# EAGLE board all sensors (EAGLE 8.2.1)
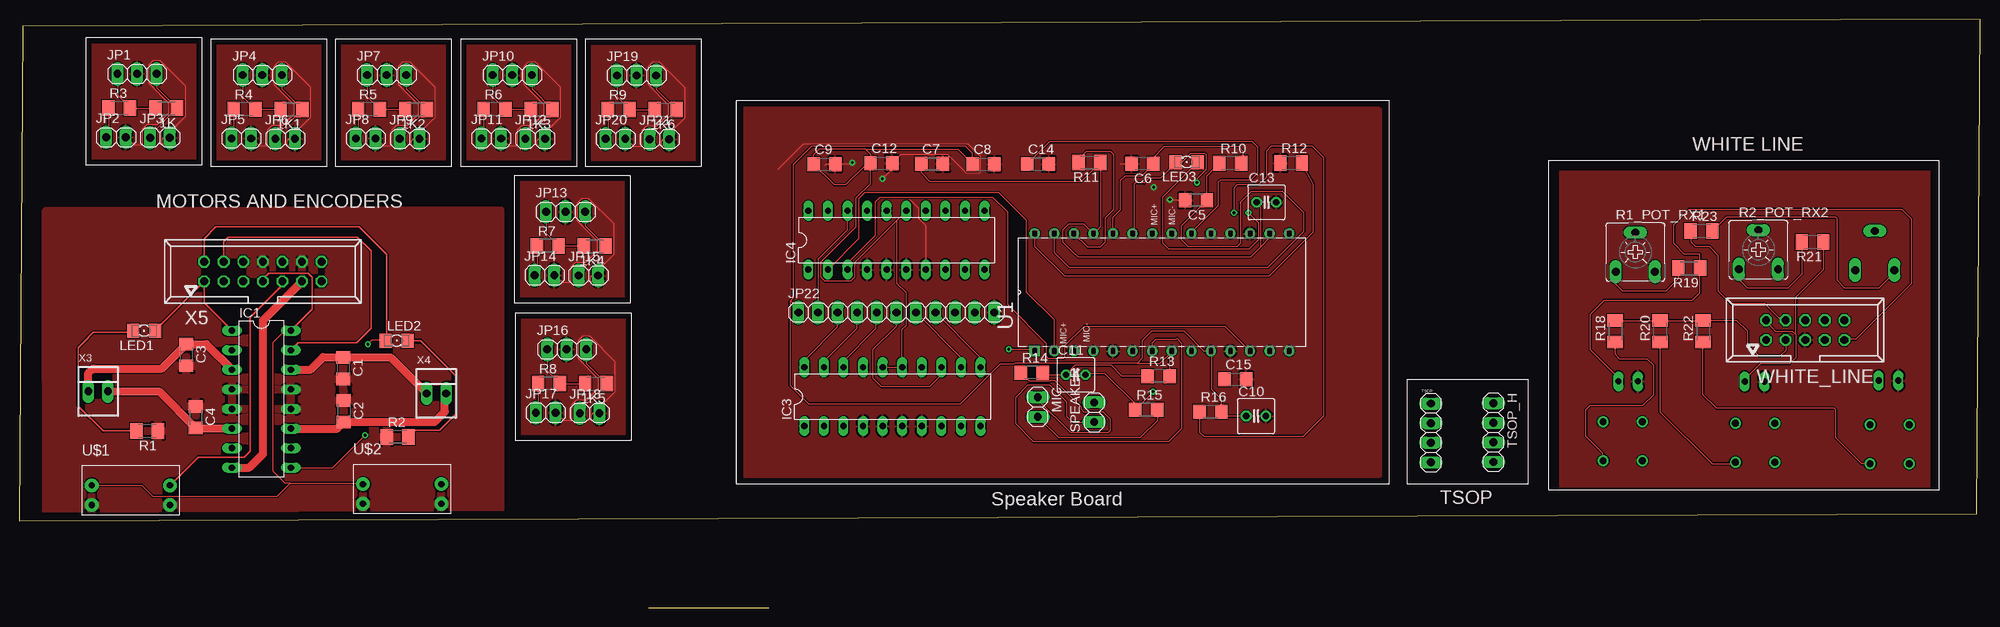
[diagram p0: board, top side]
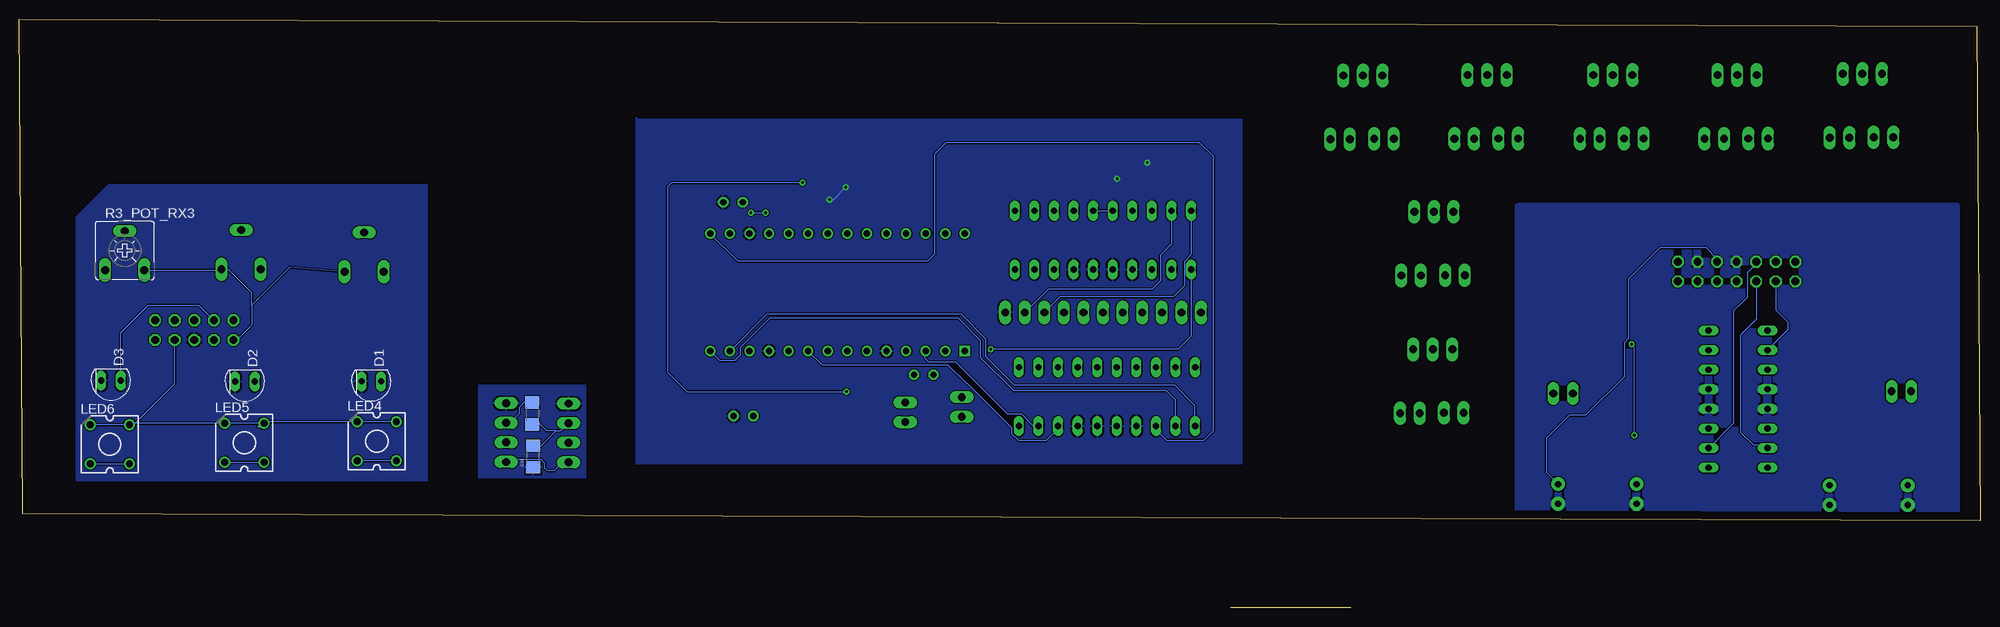
[diagram p1: board, bottom side, seen from below]

Size 254.38 x 76.29 mm. Coordinates in mm from the lower left corner, seen from the top.
Outline: 81.67,0 97.27,0
Outline: 0,11.24 253.96,12.17 254.38,76.29 0.42,75.36 0,11.24
Copper layers (1*16): Top 0.035mm / dielectric 1.5mm / Bottom 0.035mm
Design rules "default": minimum track width 6mil, minimum drill 0.35mm, track to track 6mil, track to pad 6mil, pad to pad 6mil, via to via 6mil, smd to smd 6mil, copper to edge 40mil, drill to drill 6mil, minimum pad ring 10mil, minimum via ring 8mil, stop-mask expansion 4mil, vias tented up to drill 0mil, thermal gap 10mil

## Footprints (pad centres in the part's own frame; a part is rotated, then mirrored left to right if it is on the bottom)
M1206 = smd 1.6 x 2: 1 -1.4,0; 2 1.4,0
C1206 = smd 1.6 x 1.8: 1 -1.4,0; 2 1.4,0
C025-050X050 = drill 0.813 octagon: 1 -1.27,0; 2 1.27,0
SFH206 = drill 0.813 long: A 0,-1.27; K 0,1.27
DIL16 = drill 0.813 long: 1 -8.89,-3.81; 2 -6.35,-3.81; 3 -3.81,-3.81; 4 -1.27,-3.81; 5 1.27,-3.81; 6 3.81,-3.81; 7 6.35,-3.81; 8 8.89,-3.81; 9 8.89,3.81; 10 6.35,3.81; 11 3.81,3.81; 12 1.27,3.81; 13 -1.27,3.81; 14 -3.81,3.81; 15 -6.35,3.81; 16 -8.89,3.81
DIL20 = drill 0.813 long: 1 -11.43,-3.81; 2 -8.89,-3.81; 3 -6.35,-3.81; 4 -3.81,-3.81; 5 -1.27,-3.81; 6 1.27,-3.81; 7 3.81,-3.81; 8 6.35,-3.81; 9 8.89,-3.81; 10 11.43,-3.81; 11 11.43,3.81; 12 8.89,3.81; 13 6.35,3.81; 14 3.81,3.81; 15 1.27,3.81; 16 -1.27,3.81; 17 -3.81,3.81; 18 -6.35,3.81; 19 -8.89,3.81; 20 -11.43,3.81
1X03 = drill 1.016 long: 1 -2.54,0; 2 0,0; 3 2.54,0
1X02 = drill 1.016 long: 1 -1.27,0; 2 1.27,0
1X11 = drill 1.016 long: 1 -12.7,0; 2 -10.16,0; 3 -7.62,0; 4 -5.08,0; 5 -2.54,0; 6 0,0; 7 2.54,0; 8 5.08,0; 9 7.62,0; 10 10.16,0; 11 12.7,0
1206 = smd 1.6 x 1.803: A -1.422,0; C 1.422,0
CP41B = drill 0.9 pad 1.27: 1 -2.54,2.54; 2 -2.54,-2.54; 3 2.54,-2.54; 4 2.54,2.54
CA6V = drill 1.016 long: A -2.54,-2.54; E 2.54,-2.54; S 0,2.54
R1206 = smd 1.6 x 1.803: 1 -1.422,0; 2 1.422,0
1X04 = drill 1.016 long: 1 -3.81,0; 2 -1.27,0; 3 1.27,0; 4 3.81,0
DIP254P1525X550-28P = drill 0.813 pad 1.3 square: 1 -7.62,16.51 | drill 0.813 pad 1.3: 2 -7.62,13.97; 3 -7.62,11.43; 4 -7.62,8.89; 5 -7.62,6.35; 6 -7.62,3.81; 7 -7.62,1.27; 8 -7.62,-1.27; 9 -7.62,-3.81; 10 -7.62,-6.35; 11 -7.62,-8.89; 12 -7.62,-11.43; 13 -7.62,-13.97; 14 -7.62,-16.51; 15 7.62,-16.51; 16 7.62,-13.97; 17 7.62,-11.43; 18 7.62,-8.89; 19 7.62,-6.35; 20 7.62,-3.81; 21 7.62,-1.27; 22 7.62,1.27; 23 7.62,3.81; 24 7.62,6.35; 25 7.62,8.89; 26 7.62,11.43; 27 7.62,13.97; 28 7.62,16.51
THROUGH_HOLE_NORMAL = drill 0.8 pad 1.778: 1 -5.08,1.27; 2 -5.08,-1.27; 3 5.08,-1.27; 4 5.08,1.27
057-010-1 = drill 1 octagon: 1 -5.08,-1.27; 2 -5.08,1.27; 3 -2.54,-1.27; 4 -2.54,1.27; 5 0,-1.27; 6 0,1.27; 7 2.54,-1.27; 8 2.54,1.27; 9 5.08,-1.27; 10 5.08,1.27
22-23-2021 = drill 1 long: 1 -1.27,0; 2 1.27,0
057-014-1 = drill 1 octagon: 1 -7.62,-1.27; 2 -7.62,1.27; 3 -5.08,-1.27; 4 -5.08,1.27; 5 -2.54,-1.27; 6 -2.54,1.27; 7 0,-1.27; 8 0,1.27; 9 2.54,-1.27; 10 2.54,1.27; 11 5.08,-1.27; 12 5.08,1.27; 13 7.62,-1.27; 14 7.62,1.27

## Placement (x,y rotation side)
1K  1k  [M1206]  19.07,64.76 180 top
1K1  1k  [M1206]  35.32,64.61 180 top
1K2  1k  [M1206]  51.46,64.61 180 top
1K3  1k  [M1206]  67.74,64.61 180 top
1K4  1k  [M1206]  74.65,46.87 180 top
1K5  1k  [M1206]  74.81,29.03 180 top
1K6  1k  [M1206]  83.86,64.56 180 top
C1  .1uf  [C1206]  42.03,31.04 270 top
C2  .1uf  [C1206]  42.1,25.46 270 top
C3  .1uf  [C1206]  21.67,32.76 270 top
C4  .1uf  [C1206]  22.89,24.67 270 top
C5  1n  [C1206]  152.67,52.81 180 top
C6  100n  [C1206]  145.71,57.55 180 top
C7  100n  [C1206]  118.41,57.54 0 top
C8  100n  [C1206]  125.08,57.51 0 top
C9  10u  [C1206]  104.45,57.49 0 top
C10  [C025-050X050]  160.44,24.83 0 top
C11  [C025-050X050]  137.04,30.2 0 top
C12  100n  [C1206]  111.83,57.64 0 top
C13  [C025-050X050]  161.79,52.55 0 top
C14  [C1206]  132.15,57.52 0 top
C15  [C1206]  157.75,29.6 0 top
C16  4.7uF  [C1206]  187.7,19.58 90 bottom
D1  SFH206  [SFH206]  208.71,29.33 90 bottom
D2  SFH206  [SFH206]  225.11,29.3 90 bottom
D3  SFH206  [SFH206]  242.49,29.43 90 bottom
IC1  L293D  [DIL16]  31.41,27.02 270 top
IC3  74AC11004  [DIL20]  113.27,27.34 0 top
IC4  74AC11004  [DIL20]  113.79,47.64 0 top
JP1  [1X03]  15.28,69.2 0 top
JP2  [1X02]  12.55,60.98 0 top
JP3  [1X02]  18.25,60.93 0 top
JP4  [1X03]  31.53,69.05 0 top
JP5  [1X02]  28.8,60.83 0 top
JP6  [1X02]  34.5,60.78 0 top
JP7  [1X03]  47.67,69.05 0 top
JP8  [1X02]  44.94,60.83 0 top
JP9  [1X02]  50.63,60.78 0 top
JP10  [1X03]  63.95,69.05 0 top
JP11  [1X02]  61.22,60.83 0 top
JP12  [1X02]  66.92,60.78 0 top
JP13  [1X03]  70.86,51.32 0 top
JP14  [1X02]  68.13,43.09 0 top
JP15  [1X02]  73.83,43.05 0 top
JP16  [1X03]  71.02,33.48 0 top
JP17  [1X02]  68.29,25.25 0 top
JP18  [1X02]  73.99,25.21 0 top
JP19  [1X03]  80.07,69.01 0 top
JP20  [1X02]  77.34,60.78 0 top
JP21  [1X02]  83.04,60.74 0 top
JP22  [1X11]  113.78,38.26 0 top
LED1  [1206]  16.2,35.89 180 top
LED2  [1206]  48.96,34.62 0 top
LED3  [1206]  151.46,57.76 180 top
LED4  [CP41B]  208,21.57 0 bottom
LED5  [CP41B]  225.18,21.37 0 bottom
LED6  [CP41B]  242.62,21.17 0 bottom
MIC  [1X02]  132.11,26 270 top
R1  1k  [M1206]  16.6,22.9 180 top
R1_POT_RX1  [CA6V]  209.65,46.1 0 top
R2  1k  [M1206]  49.09,22.11 0 top
R2_POT_RX2  [CA6V]  225.61,46.41 0 top
R3  1k  [M1206]  12.97,64.77 0 top
R3_POT_RX3  [CA6V]  240.7,46.3 0 bottom
R4  1k  [M1206]  29.22,64.62 0 top
R5  1k  [M1206]  45.36,64.62 0 top
R6  1k  [M1206]  61.65,64.62 0 top
R7  1k  [M1206]  68.56,46.89 0 top
R8  1k  [M1206]  68.71,29.05 0 top
R9  1k  [M1206]  77.77,64.58 0 top
R10  4.7K  [M1206]  157.1,57.61 0 top
R11  47K  [M1206]  138.83,57.71 180 top
R12  100k  [M1206]  164.99,57.64 0 top
R13  [R1206]  147.81,30.01 0 top
R14  [R1206]  131.35,30.47 0 top
R15  [R1206]  146.2,25.64 0 top
R16  [R1206]  154.54,25.38 0 top
R17  100E  [R1206]  187.83,25.17 90 bottom
R18  [M1206]  207.03,35.82 90 top
R19  [M1206]  216.62,44.02 180 top
R20  [M1206]  212.83,35.82 90 top
R21  [M1206]  232.62,47.42 180 top
R22  [M1206]  218.43,35.82 90 top
R23  [M1206]  218.23,48.82 0 top
SPEAKER  [1X02]  139.44,25.32 90 top
TSOP  [1X04]  183.12,22.64 270 top
TSOP_H  [1X04]  191.22,22.69 270 top
U1  APR9600_DIP-28  [DIP254P1525X550-28P]  148.23,40.88 90 top
U$1  MOC7811  [THROUGH_HOLE_NORMAL]  14.48,14.57 0 top
U$2  MOC7811  [THROUGH_HOLE_NORMAL]  49.67,14.74 0 top
WHITE_LINE  057-010-1  [057-010-1]  231.68,35.98 0 top
X3  LEFT_MOTOR  [22-23-2021]  10.23,28.03 0 top
X4  RIGHT_MOTOR  [22-23-2021]  54.11,27.77 0 top
X5  FRC_MOTOR  [057-014-1]  31.6,43.57 0 top

## Library data of the parts
1K 1K1-1K6 C1-C16 R1-R12 R17-R23 = rcl
D1-D3 = opto-trans-siemens; MPN: SFH206K; OC_FARNELL: 1212741; OC_NEWARK: 01M8807
IC1 = st-microelectronics; MPN: L293D; OC_FARNELL: 9589619; OC_NEWARK: 56P8249
IC3 IC4 = 74ac-logic
JP1-JP22 MIC SPEAKER TSOP TSOP_H = pinhead
LED1 LED2 LED4-LED6 = led
LED3 = adafruit
R1_POT_RX1 R2_POT_RX2 R3_POT_RX3 = pot
R13-R16 = resistor
U1 = aplus; MPN: APR9600_DIP-28; OC_FARNELL: unknown; OC_NEWARK: unknown; PACKAGE: DIP-28; SUPPLIER: APLUS INTEGRATED CIRCUITS INC
U$1 U$2 = Motor encoder MOC7811
WHITE_LINE X5 = con-panduit; OC_FARNELL: unknown; OC_NEWARK: unknown
X3 X4 = con-molex; MF: MOLEX; MPN: 22-23-2021; OC_FARNELL: 1462926; OC_NEWARK: 25C3832

## Nets
3.3V: R18.2 R20.2 R22.2 WHITE_LINE.3
5V: R1_POT_RX1.E R2_POT_RX2.E R3_POT_RX3.E WHITE_LINE.1
APR_1_M6: IC4.1 U1.1
APR_2_M7: IC4.2 U1.2
APR_3_M4: IC3.9 U1.3
APR_4_M5: IC3.10
APR_9_M3: IC3.8 U1.9
APR_12_REC: IC4.3 U1.12
APR_13_M0: IC3.1 U1.13
APR_14_M1: IC3.2 U1.14
APR_15_M2: IC3.3 U1.15
BATTERY_12V: IC1.8 X5.11
ENCODER_DATA_DL: U$1.4 X5.9
ENCODER_DATA_DR: U$2.4 X5.10
GND: C1.2 C2.1 C3.2 C4.1 IC1.4 IC1.5 IC1.12 IC1.13 R1.1 R2.1 U$1.2 U$1.3 U$2.2 U$2.3 X5.8 X5.12
GND1: JP1.2 JP2.2 JP3.2
GND2: JP4.2 JP5.2 JP6.2
GND3: JP7.2 JP8.2 JP9.2
GND4: JP10.2 JP11.2 JP12.2
GND5: JP13.2 JP14.2 JP15.2
GND6: JP16.2 JP17.2 JP18.2
GND7: JP19.2 JP20.2 JP21.2
GND8: C5.2 C6.2 C7.2 C8.2 C9.2 C10.2 C12.2 C13.2 C14.2 C15.2 IC3.4 IC3.5 IC3.6 IC3.7 IC4.4 IC4.5 IC4.6 IC4.7 JP22.11 R12.1 U1.5 U1.11 U1.17
GND9: C16.1 TSOP.1 TSOP_H.1
GND10: D1.K D2.K D3.K WHITE_LINE.5
INVERT_A2_M7_SPEAKER: IC4.19 JP22.10
INVERT_A3_M6_SPEAKER: IC4.20 JP22.9
INVERT_A4_M5_SPEAKER: IC3.11 JP22.8
INVERT_A5_M4_SPEAKER: IC3.12 JP22.7
INVERT_A6_M3_SPEAKER: IC3.13 JP22.6
INVERT_A7_M2_SPEAKER: IC3.18 JP22.5
INVERT_H3_M1_SPEAKER: IC3.19 JP22.4
INVERT_H4_M0_SPEAKER: IC3.20 JP22.3
INVERT_H4_REC: IC4.18 JP22.2
L293D_A0_IP1L: IC1.2 X5.3
L293D_A2_IP2L: IC1.7 X5.5
L293D_A3_IP1R: IC1.15 X5.4
L293D_A4_IP2R: IC1.10 X5.6
L293D_E3_PWM_L: IC1.1 LED1.A X5.1
L293D_E4_PWM_R: IC1.9 LED2.A X5.2
L293D_L1_OUT: C3.1 IC1.3 X3.1
L293D_L2_OUT: C4.2 IC1.6 X3.2
L293D_R1_OUT: C1.1 IC1.14 X4.1
L293D_R2_OUT: C2.2 IC1.11 X4.2
MIC+: U1.22
MIC-: U1.21
MICG: C11.2 LED3.C R15.1 U1.23
N$1: JP5.1 R4.1
N$2: LED1.C R1.2
N$3: JP8.1 R5.1
N$4: LED2.C R2.2
N$5: JP11.1 R6.1
N$6: JP14.1 R7.1
N$7: JP17.1 R8.1
N$8: JP20.1 R9.1
N$9: JP2.1 R3.1
N$10: C11.1 R13.1 R14.2
N$11: MIC.1 R14.1
N$12: MIC.2 R15.2
N$13: LED3.A R16.1
N$14: R1_POT_RX1.A R19.2
N$15: R2_POT_RX2.A R21.2
N$16: R3_POT_RX3.A R23.2
N$17: LED6.2 LED6.3 R22.1
N$18: LED4.2 LED4.3 R18.1
N$19: WHITE_LINE.6
N$20: WHITE_LINE.8
N$21: WHITE_LINE.10
N$22: LED5.2 LED5.3 R20.1
PIN_DATA: 1K.1 JP1.3 JP3.1
PIN_DATA1: 1K1.1 JP4.3 JP6.1
PIN_DATA2: 1K2.1 JP7.3 JP9.1
PIN_DATA3: 1K3.1 JP10.3 JP12.1
PIN_DATA4: 1K4.1 JP13.3 JP15.1
PIN_DATA5: 1K5.1 JP16.3 JP18.1
PIN_DATA6: 1K6.1 JP19.3 JP21.1
PIN_DATA_A1: LED4.1 LED4.4 LED5.1 LED5.4 LED6.1 LED6.4 WHITE_LINE.7
PIN_DATA_K0: D1.A R19.1 WHITE_LINE.9
PIN_DATA_K1: D2.A R21.1 WHITE_LINE.2
PIN_DATA_K2: D3.A R23.1 WHITE_LINE.4
ROSC: R11.2 U1.26
RSTB: C5.1 R10.1 U1.27
SENSOR_5V: IC1.16 U$1.1 U$2.1 X5.7
SENSOR_5V1: 1K.2 JP1.1 R3.2
SENSOR_5V2: 1K1.2 JP4.1 R4.2
SENSOR_5V3: 1K2.2 JP7.1 R5.2
SENSOR_5V4: 1K3.2 JP10.1 R6.2
SENSOR_5V5: 1K4.2 JP13.1 R7.2
SENSOR_5V6: 1K5.2 JP16.1 R8.2
SENSOR_5V7: 1K6.2 JP19.1 R9.2
SENSOR_5V8: R17.2 TSOP_H.2
SRSTB: R12.2 U1.28
TSOP_2_5V: C16.2 R17.1 TSOP.2
TSOP_DATA_F1: TSOP.4 TSOP_H.4
VCC: C8.1 C9.1 C10.1 C12.1 IC3.15 IC3.16 IC4.15 IC4.16 JP22.1 R13.2 R16.2 U1.8 U1.10
VCM: C14.1 U1.20
VDDL: C6.1 R10.2 U1.24
VLDO: C7.1 C13.1 R11.1 U1.16 U1.25
VOUT1: SPEAKER.1 U1.7
VOUT2: SPEAKER.2
VREF: C15.1

## Tracks (layer width: path | path; a pad name or v marks a point on that pad's centre or on a via)
3.3V
  Top 0.152: R18.2 R20.2 R22.2 222.83,37.22 224.23,35.82 224.23,34.02 225.62,32.62 228.43,32.62 229.14,33.33 WHITE_LINE.3
5V
  Bottom 0.152: WHITE_LINE.1 226.14,34.71 224.23,36.62 224.23,39.22 | 224.23,39.22 224.23,40.82 227.28,43.87 R2_POT_RX2.E 228.26,43.76 R3_POT_RX3.E | R1_POT_RX1.E 219.29,44.16 224.23,39.22
APR_1_M6  (via drill 0.35)
  Top 0.152: v128.36,33.5 131.49,33.5 U1.1
  Bottom 0.152: IC4.1 102.36,35.2 104.07,33.5 v128.36,33.5
APR_2_M7
  Top 0.152: U1.2 134.26,37.3 130.67,40.9 130.67,50.2 127.07,53.8 109.67,53.8 108.87,53 108.87,47.8 IC4.2
APR_3_M4
  Bottom 0.152: IC3.9 122.79,23.53 124.34,25.08 126.14,25.08 132.87,31.8 136.37,31.8 136.87,32.3 136.87,33.2 U1.3
APR_9_M3
  Bottom 0.152: IC3.8 119.62,23.14 121.17,21.6 124.69,21.6 125.59,22.5 125.59,23.23 131.37,29 131.47,29 133.87,31.4 150.18,31.4 U1.9
APR_12_REC
  Top 0.152: IC4.3 107.44,44.68 111.07,48.3 111.07,52.6 111.67,53.2 126.27,53.2 128.17,51.3 128.17,39.3 133.17,34.3 133.17,32.6 133.47,32.3 135.47,32.3 135.67,32.5 135.67,34 138.17,36.5 156.43,36.5 U1.12
APR_13_M0
  Bottom 0.152: IC3.1 101.84,26.18 104.47,28.8 125.27,28.8 128.97,32.5 128.97,34.8 132.17,38 157.47,38 U1.13
APR_14_M1
  Bottom 0.152: IC3.2 104.38,26.92 105.57,28.1 125.37,28.1 129.67,32.4 129.67,34.6 132.57,37.5 157.07,37.5 160.87,33.7 160.87,32.7 161.57,32 163.48,32 U1.14
APR_15_M2
  Bottom 0.152: IC3.3 106.92,23.06 105.57,21.7 100.67,21.7 99.47,22.9 99.47,58.5 101.27,60.3 134.17,60.3 135.67,58.8 135.67,45.8 136.57,44.9 161.14,44.9 U1.15
BATTERY_12V
  Top 1.016: IC1.8 29.82,18.13 31.62,19.93 31.62,37.25 X5.11
ENCODER_DATA_DL
  Top 0.2: X5.9 34.14,41.84 29.97,37.67 29.97,20.3 29.18,19.5 23.22,19.5 U$1.4
ENCODER_DATA_DR
  Bottom 0.152: X5.10 34.14,45.23 35.56,46.65 | 35.56,46.65 35.65,46.74 | 35.56,46.65 41.56,46.65 45.63,42.58 45.63,34.91 46.19,34.35 46.19,29.95 51.2,24.93 53.31,24.93 56.3,21.94 56.3,17.56 U$2.4
GND
  pour Top: 62.38,51.56 62.38,6.94 3.5,6.94 3.44,51.43
  pour Bottom: 59.93,51.96 59.93,9.84 3.11,9.84 3.11,51.8 3.11,51.8 3.11,52
GND1
  Top 0.152: JP2.2 13.94,60.98 14.88,60.04 15.99,60.04 15.99,62.11 16.57,62.69 17.97,62.69 19.44,64.16 19.44,65.36 16.83,67.97 16.83,70.38 17.41,70.96 18.23,70.96 21.5,67.69 21.5,63.66 18.47,60.63 18.47,60.04 18.62,60.04 JP3.2
  pour Top: 10.05,73.14 22.86,73.14 22.86,58.14 17.05,58.14 9.46,58.14 9.46,73.14
GND2
  Top 0.152: JP5.2 30.19,60.83 31.13,59.89 32.23,59.89 32.23,61.95 32.81,62.54 34.22,62.54 35.69,64.01 35.69,65.2 33.08,67.81 33.08,70.22 33.66,70.8 34.48,70.8 37.75,67.54 37.75,63.51 34.72,60.48 34.72,59.89 34.87,59.89 JP6.2
  pour Top: 26.3,72.99 39.1,72.99 39.1,57.99 33.3,57.99 25.7,57.99 25.7,72.99
GND3
  Top 0.152: JP8.2 46.33,60.83 47.27,59.89 48.37,59.89 48.37,61.95 48.95,62.54 50.35,62.54 51.83,64.01 51.83,65.2 49.22,67.81 49.22,70.22 49.8,70.8 50.62,70.8 53.88,67.54 53.88,63.51 50.85,60.48 50.85,59.89 51.01,59.89 JP9.2
  pour Top: 42.44,72.99 55.24,72.99 55.24,57.99 49.44,57.99 41.84,57.99 41.84,72.99
GND4
  Top 0.152: JP11.2 62.61,60.83 63.55,59.89 64.66,59.89 64.66,61.95 65.24,62.54 66.64,62.54 68.12,64.01 68.12,65.2 65.5,67.81 65.5,70.22 66.08,70.8 66.91,70.8 70.17,67.54 70.17,63.51 67.14,60.48 67.14,59.89 67.3,59.89 JP12.2
  pour Top: 58.73,72.99 71.53,72.99 71.53,57.99 65.73,57.99 58.13,57.99 58.13,72.99
GND5
  Top 0.152: JP14.2 69.52,43.09 70.47,42.15 71.57,42.15 71.57,44.22 72.15,44.8 73.55,44.8 75.03,46.28 75.03,47.47 72.41,50.08 72.41,52.49 72.99,53.07 73.81,53.07 77.08,49.8 77.08,45.78 74.05,42.75 74.05,42.15 74.21,42.15 JP15.2
  pour Top: 65.64,55.26 78.44,55.26 78.44,40.26 72.64,40.26 65.04,40.26 65.04,55.26
GND6
  Top 0.152: JP17.2 69.68,25.25 70.62,24.31 71.72,24.31 71.72,26.38 72.3,26.96 73.71,26.96 75.18,28.43 75.18,29.63 72.57,32.24 72.57,34.65 73.15,35.23 73.97,35.23 77.24,31.96 77.24,27.94 74.2,24.91 74.2,24.31 74.36,24.31 JP18.2
  pour Top: 65.79,37.42 78.59,37.42 78.59,22.42 72.79,22.42 65.19,22.42 65.19,37.42
GND7
  Top 0.152: JP20.2 78.73,60.78 79.67,59.84 80.78,59.84 80.78,61.91 81.36,62.49 82.76,62.49 84.23,63.96 84.23,65.16 81.62,67.77 81.62,70.18 82.2,70.76 83.03,70.76 86.29,67.49 86.29,63.47 83.26,60.43 83.26,59.84 83.42,59.84 JP21.2
  pour Top: 74.85,72.95 87.65,72.95 87.65,57.95 81.85,57.95 74.25,57.95 74.25,72.95
GND8  (via drill 0.35)
  Top 0.152: 142.87,57.55 C6.2 | C5.2 149.36,52.81 v149.27,52.9 | v111.97,55.6 113.23,56.86 C12.2 114.36,58.77 120.4,58.77 122.79,56.38 124.58,56.38 124.71,56.51 124.71,58.5 123.11,60.11 101.67,60.11 98.35,56.78 | 104.47,57.3 104.66,57.49 C9.2 107.86,57.49 v108.07,57.7 | IC4.7 117.6,49.53 116.72,50.42 116.72,51.72 115.54,52.9
  Bottom 0.152: v149.27,52.9 148.77,52.9 v147.17,54.5
  pour Top: 93.97,16.9 176.57,16.9 176.77,17.1 176.77,64.6 176.47,64.9 93.97,64.9
  pour Bottom: 95.77,18.6 174.37,18.6 174.37,63.6 174.17,63.4 95.77,63.4
GND9
  pour Bottom: 180.87,28.8 194.87,28.8 194.87,16.8 180.87,16.8
GND10
  Bottom 0.152: D2.K 226.38,29.41
  pour Bottom: 201.43,54.82 242.83,54.82 247.03,50.62 247.03,16.42 201.43,16.42
  pour Top: 199.83,56.62 247.83,56.62 247.83,15.62 199.83,15.62
INVERT_A2_M7_SPEAKER
  Bottom 0.152: IC4.19 104.9,47.16 106.37,45.7 106.37,42.4 107.47,41.3 120.9,41.3 JP22.10
INVERT_A3_M6_SPEAKER
  Bottom 0.152: IC4.20 102.36,45.75 103.25,44.86 103.25,41.72 104.67,40.3 119.36,40.3 JP22.9
INVERT_A4_M5_SPEAKER
  Top 0.152: IC3.11 124.7,32.41 JP22.8
INVERT_A5_M4_SPEAKER
  Top 0.152: IC3.12 122.16,32.41 JP22.7
INVERT_A6_M3_SPEAKER
  Top 0.152: IC3.13 119.62,30.16 118.07,28.6 111.87,28.6 110.77,29.7 110.77,33.5 113.77,36.5 113.77,38.25 JP22.6
INVERT_A7_M2_SPEAKER
  Top 0.152: IC3.18 106.92,31.96 111.17,36.2 111.17,38.19 JP22.5
INVERT_H3_M1_SPEAKER
  Top 0.152: IC3.19 104.38,31.92 108.67,36.2 108.67,38.23 JP22.4
INVERT_H4_M0_SPEAKER
  Top 0.152: IC3.20 101.84,32.08 106.17,36.4 JP22.3
INVERT_H4_REC
  Top 0.152: JP22.2 103.62,45.15 107.47,49 107.47,51.43 IC4.18
L293D_A0_IP1L
  Bottom 0.152: X5.3 26.52,38.61 24.99,37.08 24.99,35.99 IC1.2
L293D_A2_IP2L
  Bottom 0.152: X5.5 29.06,37.4 31.12,35.34 31.12,22.76 29.45,21.09 28.02,21.09 IC1.7
L293D_A3_IP1R
  Top 0.2: X5.4 26.52,47.47 27.08,48.03 43.86,48.03 45.65,46.24 45.65,36.24 43.74,34.33 36.17,34.33 IC1.15
L293D_A4_IP2R
  Bottom 0.152: X5.6 29.06,44.56 30.22,43.4 30.22,40.24 31.09,39.38 32.01,38.46 32.01,23.89 IC1.10
L293D_E3_PWM_L
  Top 0.2: LED1.A 17.62,35.95 X5.1 23.98,39.54 IC1.1
L293D_E4_PWM_R  (via drill 0.35)
  Top 0.152: IC1.9 40.65,18.13 v44.86,22.35 | v45.23,34.15 45.23,34.19 45.76,34.72 47.44,34.72 LED2.A
  Top 0.2: X5.2 23.98,47.85 25.48,49.35 44.1,49.35 47.65,45.8 47.65,34.73 LED2.A
  Bottom 0.152: v44.86,22.35 44.86,33.78 v45.23,34.15
L293D_L1_OUT
  Top 1.016: X3.1 8.96,30.42 9.53,30.99 18.51,30.99 C3.1 24.28,34.16 IC1.3
L293D_L2_OUT
  Top 1.016: X3.2 18.13,28.03 C4.2 27.55,23.27 IC1.6
L293D_R1_OUT
  Top 1.016: IC1.14 37.78,30.84 39.4,32.46 42.02,32.46 C1.1 48.16,32.44 X4.1
L293D_R2_OUT
  Top 1.016: IC1.11 41.26,23.21 C2.2 53.87,24.06 55.19,25.39 55.19,27.58 X4.2
MICG  (via drill 0.35)
  Top 0.152: 144.42,48.66 U1.23 144.57,48.65 144.57,54.9 144.77,55.1 145.97,55.1 | C11.2 138.42,30.3 140.87,30.3 144.77,26.39 R15.1 147.07,27.94 v147.07,28 | 145.97,55.1 146.57,55.7 148.07,55.7 150.03,57.67 LED3.C 150.85,57.76 151.98,58.89 153.77,58.89 153.91,58.76 153.91,56.77 152.77,55.63 v152.77,55.1 | 145.97,55.1 145.87,55
  Bottom 0.152: v152.77,55.1 169.77,55.1 170.27,54.6 170.27,30.5 167.77,28 v147.07,28
N$1
  Top 0.152: R4.1 27.82,61.12 JP5.1
N$2
  Top 0.2: R1.2 10.87,22.9 7.65,26.12 7.65,33.71 8.29,34.35 9.62,35.68 14.57,35.68 LED1.C
N$3
  Top 0.152: R5.1 43.96,61.12 JP8.1
N$4
  Top 0.2: LED2.C 52.04,34.62 56.61,30.04 56.61,25.07 54.5,22.96 51.34,22.96 R2.2
N$5
  Top 0.152: R6.1 60.25,61.12 JP11.1
N$6
  Top 0.152: R7.1 67.16,43.39 JP14.1
N$7
  Top 0.152: R8.1 67.31,25.55 JP17.1
N$8
  Top 0.152: R9.1 76.37,61.08 JP20.1
N$9
  Top 0.152: R3.1 11.57,61.27 JP2.1
N$10
  Top 0.152: R14.2 133.04,30.2 C11.1 136.98,31.4 141.67,31.4 143.06,30.01 R13.1
N$11
  Top 0.152: MIC.1 132.11,26.95 136.37,22.7 141.27,22.7 141.57,23 141.57,24.4 140.62,25.35 | 140.62,25.35 140.57,25.4 | 140.62,25.35 138.12,25.35 137.77,25.7 137.77,26 134.37,29.4 133.73,29.4 133.67,29.34 131.06,29.34 R14.1
N$12
  Top 0.152: R15.2 147.62,24.25 145.37,22 134.84,22 MIC.2
N$13  (via drill 0.35)
  Top 0.152: R16.1 153.11,22.75 153.67,22.2 166.57,22.2 169.27,24.9 169.27,58.3 167.77,59.8 162.37,59.8 161.77,59.2 161.77,55.8 160.77,54.8 157.97,54.8 157.57,54.4 v157.57,51.2 158.11,51.2 | LED3.A 152.83,57.76 148.27,53.2 148.27,47.3 149.07,46.5 151.54,46.5 159.56,46.5 160.76,47.7 160.76,49.91 v159.47,51.2
  Bottom 0.152: v159.47,51.2 158.27,51.2 | 158.27,51.2 157.67,51.2 | 158.27,51.2 v157.57,51.2
N$14
  Top 0.152: R19.2 215.23,42.62 213.62,41.02 208.03,41.02 207.03,42.02 207.03,43.48 R1_POT_RX1.A
N$15
  Top 0.152: R21.2 231.23,43.22 229.43,41.42 224.23,41.42 223.03,42.62 223.03,43.83 R2_POT_RX2.A
N$16
  Top 0.152: R3_POT_RX3.A 243.24,43.43 241.23,41.42 236.83,41.42 235.83,42.42 235.83,50.42 235.62,50.62 221.43,50.62 R23.2
N$17
  Top 0.152: LED6.3 239.02,18.63 235.62,22.02 235.62,25.62 235.43,25.82 220.23,25.82 218.43,27.62 R22.1
  Bottom 0.152: LED6.2 LED6.3
N$18
  Top 0.152: 206.03,34.42 R18.1 207.03,32.82 207.62,32.22 211.23,32.22 212.03,31.42 212.03,27.62 210.62,26.22 203.83,26.22 203.23,25.62 203.23,22.22 205.46,19.99 LED4.3
  Bottom 0.152: LED4.3 LED4.2
N$22
  Top 0.152: R20.1 212.83,25.42 219.62,18.62 222.43,18.62 LED5.3
  Bottom 0.152: LED5.2 LED5.3
PIN_DATA
  Top 0.152: JP3.1 16.98,61.24 18.94,63.2 18.94,63.23 1K.1 17.82,67.41 JP1.3
PIN_DATA1
  Top 0.152: JP6.1 33.23,61.09 35.19,63.05 35.19,63.07 1K1.1 34.07,67.26 JP4.3
PIN_DATA2
  Top 0.152: JP9.1 49.37,61.09 51.32,63.05 51.32,63.07 1K2.1 50.21,67.26 JP7.3
PIN_DATA3
  Top 0.152: JP12.1 65.65,61.09 67.61,63.05 67.61,63.07 1K3.1 66.5,67.26 JP10.3
PIN_DATA4
  Top 0.152: JP15.1 72.56,43.36 74.52,45.32 74.52,45.34 1K4.1 73.41,49.52 JP13.3
PIN_DATA5
  Top 0.152: JP18.1 72.72,25.51 74.67,27.47 74.67,27.5 1K5.1 73.56,31.68 JP16.3
PIN_DATA6
  Top 0.152: JP21.1 81.77,61.04 83.73,63 83.73,63.03 1K6.1 82.61,67.21 JP19.3
PIN_DATA_A1
  Bottom 0.152: LED4.4 LED4.1 222.74,24.11 223.43,23.42 223.12,23.42 LED5.4 LED5.1 239.89,23.91 LED6.4 | LED6.4 LED6.1 | LED6.4 239.54,23.71 234.23,29.02 234.23,34.7 WHITE_LINE.7
PIN_DATA_K0
  Top 0.152: WHITE_LINE.9 236.87,34.82 238.23,34.82 245.43,42.02 245.43,50.42 244.23,51.62 216.62,51.62 214.62,49.62 214.62,47.22 216.03,45.82 218.03,45.82 R19.1 218.03,40.82 217.03,39.82 205.62,39.82 203.83,38.02 203.83,33.42 207.44,29.81 D1.A
PIN_DATA_K1
  Top 0.152: 230.43,35.42 230.43,40.22 234.03,43.82 R21.1 | 230.43,35.42 230.43,32.42 229.62,31.62 225.83,31.62 223.84,29.63 D2.A | WHITE_LINE.2 226.6,37.05 227.33,36.32 | 227.43,36.22 227.33,36.32 | 227.33,36.32 227.83,35.82 230.03,35.82 230.43,35.42
PIN_DATA_K2
  Top 0.152: R23.1 216.83,47.42 217.43,46.82 219.23,46.82 220.43,45.62 220.43,41.02 222.03,39.42 226.43,39.42 228.6,37.25 WHITE_LINE.4
  Bottom 0.152: D3.A 241.22,35.63 237.62,39.22 231.11,39.22 WHITE_LINE.4
ROSC
  Top 0.152: R11.2 137.43,58.16 138.47,59.2 141.57,59.2 141.97,58.8 141.97,51.6 140.87,50.5 140.87,47.4 140.17,46.7 138.61,46.7 U1.26
RSTB
  Top 0.152: 134.26,46.01 134.27,46 | 134.27,46 136.17,44.1 161.97,44.1 166.67,48.8 166.67,51.2 163.87,54 159.87,54 158.42,52.55 | 158.37,52.5 158.42,52.55 | R10.1 154.07,55.98 C5.1 150.77,49.51 150.77,47.7 151.67,46.8 157.97,46.8 158.42,47.25 158.42,52.55 | 134.27,46 U1.27
SENSOR_5V
  Top 0.152: IC1.16 34.45,35.91 32.89,34.35 32.89,17.73 34.52,16.1 35.15,16.1 | 35.15,16.1 44.49,16.1 U$2.1 | U$1.1 15.91,15.84 17.33,14.42 33.46,14.42 35.15,16.1
  Top 0.2: X5.7 31.6,42.57 32.37,43.35 37.5,43.35 38.02,42.83 38.02,38.71 IC1.16
SENSOR_5V1
  Top 0.152: JP1.1 12.74,66.41 R3.2 17.66,64.77 1K.2
SENSOR_5V2
  Top 0.152: JP4.1 28.99,66.25 R4.2 33.9,64.62 1K1.2
SENSOR_5V3
  Top 0.152: JP7.1 45.13,66.25 R5.2 50.04,64.62 1K2.2
SENSOR_5V4
  Top 0.152: JP10.1 61.41,66.25 R6.2 66.33,64.62 1K3.2
SENSOR_5V5
  Top 0.152: JP13.1 68.33,48.52 R7.2 73.24,46.89 1K4.2
SENSOR_5V6
  Top 0.152: JP16.1 68.48,30.68 R8.2 73.39,29.05 1K5.2
SENSOR_5V7
  Top 0.152: JP19.1 77.53,66.21 R9.2 82.45,64.58 1K6.2
SENSOR_5V8
  Bottom 0.152: R17.2 187.87,26.6 188.87,26.6 189.57,25.9 189.57,25.1 190.67,24 191.17,24 TSOP_H.2
SRSTB
  Top 0.152: U1.28 131.72,46.84 135.57,43 162.17,43 167.87,48.7 167.87,54.87 R12.2
TSOP_2_5V
  Bottom 0.152: 184.77,22.9 184.17,22.9 183.17,23.9 TSOP.2 | 184.77,22.9 185.97,22.9 186.87,23.8 187.77,23.8 R17.1 | C16.2 186.69,20.98 184.77,22.9
TSOP_DATA_F1
  Bottom 0.152: TSOP.4 183.91,18.83 185.03,17.71 185.86,17.71 186.22,18.08 186.22,18.73 186.7,19.21 190.37,19.21 190.7,18.88 TSOP_H.4
VCC
  Top 0.152: IC3.16 IC3.15 114.54,36.08 115.07,36.6 115.07,40.8 113.87,42 113.87,50.26 IC4.15 108.33,44.72 108.33,42.8 107.81,42.28 104.54,42.28 104.02,42.8 104.02,44.86 108.56,49.41 108.56,53.13 110.43,54.99 C12.1 | 103.05,57.54 103.05,58.69 103.77,59.4 109.79,59.4 | 109.79,59.4 121.79,59.4 C8.1 123.68,58.89 122.77,59.8 102.77,59.8 100.37,57.4 100.37,40.1 100.03,39.76 | 109.79,59.4 110.43,58.77 C12.1 | R13.2 149.24,32.7 149.5,32.97 149.5,33.18 | C10.1 156.51,24.83 R16.2 155.96,27.01 154.67,28.3 154.67,32.99 154.4,33.26 | 100.03,39.76 99.97,39.7 99.97,28.8 102.37,26.4 122.07,26.4 127.27,31.6 129.03,31.6 129.14,31.7 145.07,31.7 | 145.07,31.7 147.87,31.7 | 147.87,31.7 147.94,31.7 | 145.07,31.7 145.67,32.3 145.67,34.6 146.87,35.8 151.17,35.8 153.7,33.26 154.4,33.26 | U1.10 154.4,33.26 | C12.1 110.01,57.64 107.17,54.8 105.75,54.8 C9.1 | JP22.1 101.08,38.72 100.03,39.76 | 147.87,31.7 147.97,31.7 148.67,32.4 148.72,32.4 149.5,33.18 | 149.5,33.18 U1.8
  Bottom 0.152: IC4.15 IC4.16
VCM
  Top 0.152: 152.67,48.5 U1.20 152.04,48.68 155.57,52.2 155.57,55.2 155.87,55.5 159.77,55.5 160.67,56.4 160.67,59.7 159.97,60.4 133.63,60.4 C14.1
VDDL
  Top 0.152: 147.11,57.48 C6.1 147.11,58.34 148.57,59.8 158.17,59.8 158.77,59.2 158.77,57.64 R10.2 | 147.07,57.51 147.11,57.48 | U1.24 141.88,50.62 142.87,51.6 142.87,55.4 143.47,56 145.63,56 147.11,57.48
VLDO
  Top 0.152: C7.1 117.01,56.36 118.07,55.3 137.82,55.3 R11.1 140.23,49.39 U1.25 138.05,49.8 136.17,49.8 135.37,49 135.37,47.4 136.87,45.9 136.97,45.9 137.37,45.5 159.77,45.5 161.07,46.8 | 160.52,52.42 C13.1 | 160.52,52.42 160.52,51.85 | 161.07,46.8 161.07,51.87 160.52,52.42 | U1.16 162.2,47.94 161.07,46.8
VOUT1
  Top 0.152: U1.7 146.96,34.3 147.47,34.8 150.07,34.8 150.17,34.9 150.77,34.3 150.77,23.2 149.07,21.5 131.57,21.5 129.27,23.8 129.27,27.3 130.87,28.9 133.67,28.9 135.87,26.7 135.87,24.8 136.67,24 139.39,24 SPEAKER.1

## Text on the board
tNames: WHITE LINE | MIC- | MOTORS AND ENCODERS | MIC+ | MIC+ | MIC- | Speaker Board | TSOP